# Altium PCB PCB_TUD-EHC-SolarModule_1.pcbdoc
Units mm, origin at the board's own origin, x right, y up, seen from the top; angles counter-clockwise.
Board outline 74.31 x 35.93 mm, 2 copper layers (Top Layer, Bottom Layer); 27 components, 21 nets, 81 pads, 19 vias.
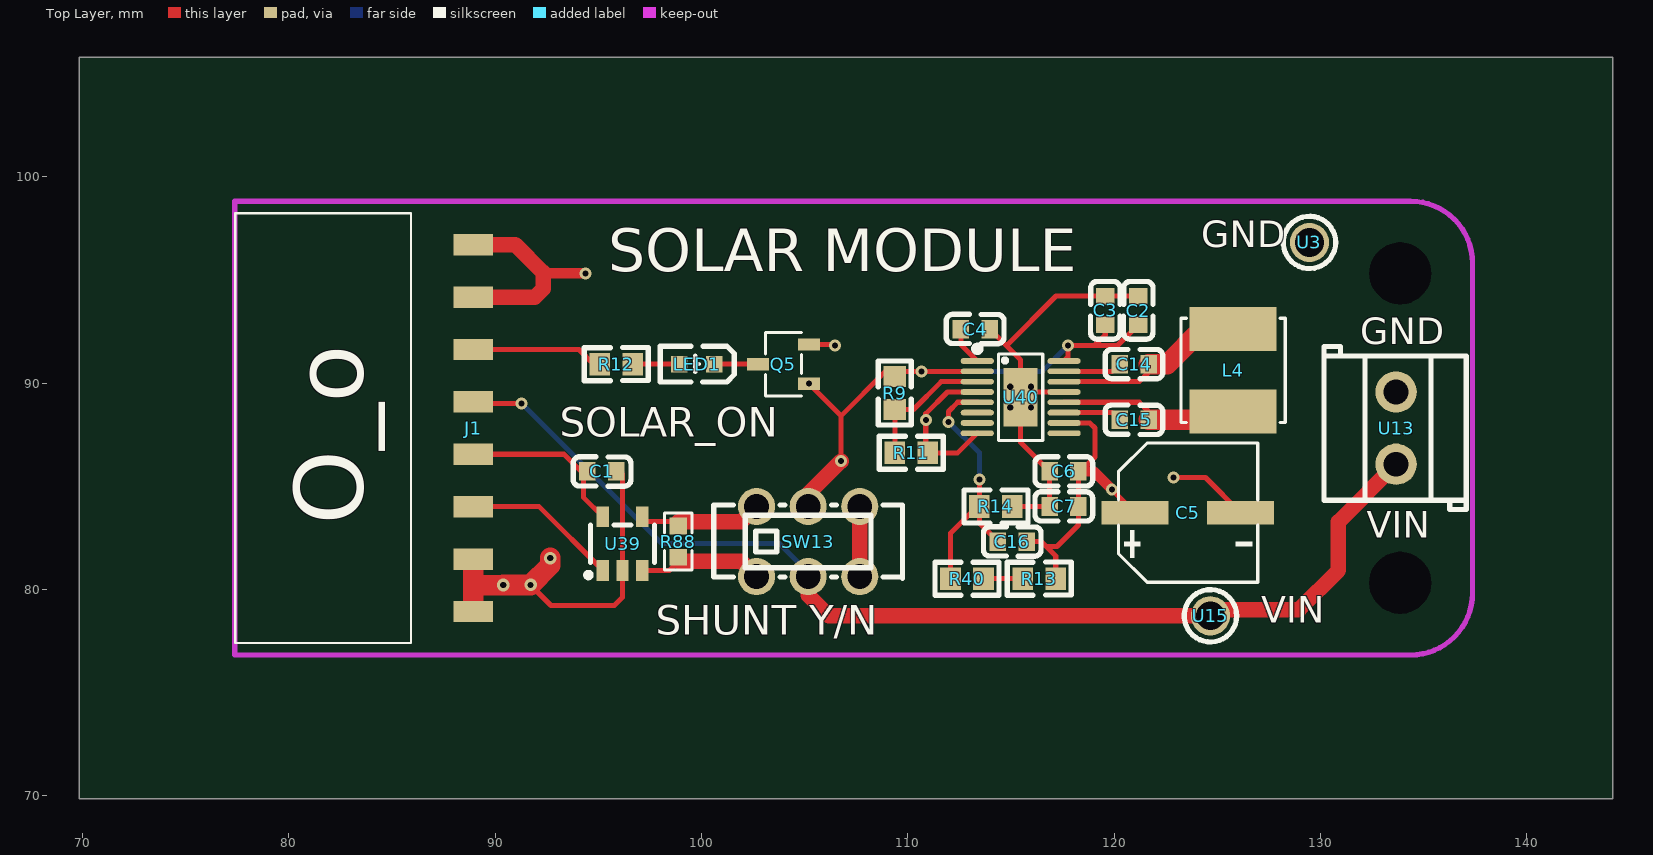
[diagram p0: Top Layer view]
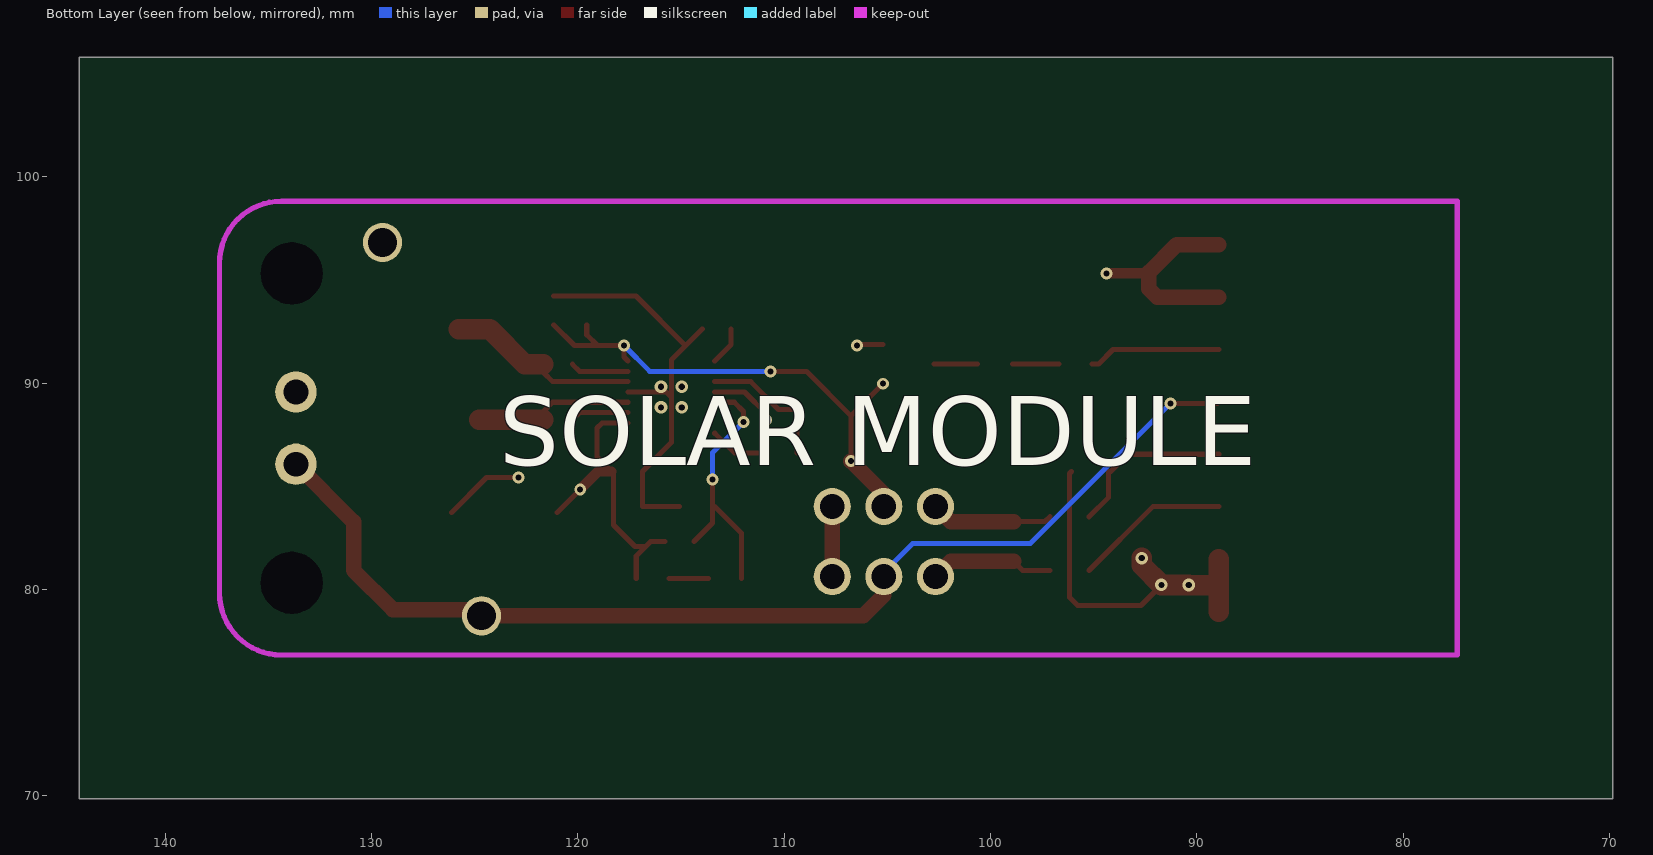
[diagram p1: Bottom Layer view, seen from below]

## Layer stack, top to bottom
Top Layer: signal copper (thickness not stored)
Dielectric: dielectric 0.32, FR-4, Dk 4.8
Bottom Layer: signal copper (thickness not stored)

## Board outline
144.162,69.85 69.85,69.85 69.85,105.78 144.162,105.78
cut-out: 135.373,95.315 ccw(c133.873,95.315) 132.373,95.315 ccw(c133.873,95.315)
cut-out: 135.373,80.315 ccw(c133.873,80.315) 132.373,80.315 ccw(c133.873,80.315)

## Components (designator, comment, footprint, x,y, rotation, side; value= is the part's Value field where it differs from the comment)
C1 "100nF" C0603 95.173,85.715 r180 top
C2 "4.7uF" C0603 121.173,93.515 r270 top
C3 "4.7uF" C0603 119.573,93.515 r270 top
C4 "4.7uF" C0603 113.273,92.615 r0 top
C5 "220uF" CAP-SMD_BD6.3-L6.6-W6.6-LS7.2-R-RD 123.573,83.715 r180 top
C6 "4.7uF" C0603 117.573,85.715 r0 top
C7 "4.7uF" C0603 117.573,84.015 r0 top
C14 "CL10B223KB8NNNC" C0603 120.973,90.915 r0 top
C15 "CL10B223KB8NNNC" C0603 120.973,88.215 r0 top
C16 "CL10C200JB8NNNC" C0603 115.073,82.315 r0 top
J1 "SMH-108-02-G-S-TR" SMH-108-02-XX-S-TR 88.93,87.815 r270 top
L4 "SWPA5040S4R7NT" IND-SMD_L5.0-W5.0 125.773,90.615 r90 top
LED1 "KT-0603R" LED0603-R-RD 99.773,90.915 r180 top
Q5 "AO3400A" SOT-23-3_L2.9-W1.6-P1.90-LS2.8-BR 103.973,90.915 r0 top
R9 "1MΩ" R0603#1 109.373,89.515 r90 top
R11 "5.1MΩ" R0603#1 110.173,86.615 r0 top
R12 "1kΩ" R0603#1 95.873,90.915 r0 top
R13 "3MΩ" R0603#1 116.373,80.515 r0 top
R14 "1MΩ" R0603#1 114.273,84.015 r180 top
R40 "200kΩ" R0603#1 112.873,80.515 r180 top
R88 "0603WAF220JT5E" R0603#2 98.873,82.315 r270 top
SW13 "K3-2235D-F1" SW-TH_K3-2235D-F1 105.173,82.315 r0 top
U3 "5001" TEST-TH_BD2.54-P1.39 129.473,96.815 r0 top
U13 "KF350-3.5-2P" CONN-TH_P3.50_KF350-3.5-2P 133.673,87.815 r90 top
U15 "5001" TEST-TH_BD2.54-P1.39 124.673,78.715 r0 top
U39 "INA180A3IDBVR" SOT-23-5_L3.0-W1.7-P0.95-LS2.8-BR 96.173,82.215 r270 top
U40 "LTC3129EMSE-1#PBF" MSOP-16_L4.0-W3.0-P0.50-LS4.9-BL-EP 115.473,89.315 r270 top

## Footprints (in the part's own frame and the unit in brackets; to place one, negate y for a bottom-side part, rotate by r counter-clockwise, add the part's x,y. Pads: shape width x height; smd on the part's side, far side on the other; paste and mask are expansions set on the pad)
C0603 [mm]
  rect 0.8x0.9 smd paste+0 mask+0.051: 1(-0.7,0) 2(0.7,0)
  silkscreen extent -1.41,-0.71 1.39,0.72
CAP-SMD_BD6.3-L6.6-W6.6-LS7.2-R-RD [mm]
  rect 3.26x1.15 smd paste+0 mask+0.051: 1(2.555,0) 2(-2.555,0)
  silkscreen extent -3.39,-3.38 3.36,3.38
CONN-TH_P3.50_KF350-3.5-2P [mm]
  round 2 hole 1.2 paste+0 mask+0.051: 1(-1.75,0) 2(1.75,0)
  silkscreen extent -3.95,-3.4 3.95,3.5
IND-SMD_L5.0-W5.0 [mm]
  rect 2.124x4.22 smd paste+0 mask+0.051: 1(2,0) 2(-2,0)
  silkscreen extent -2.53,-2.53 2.53,2.53
LED0603-R-RD [mm]
  rect 0.8x0.8 smd paste+0 mask+0.051: 1(0.851,0) 2(-0.851,0)
  silkscreen extent -1.82,-0.86 1.77,0.86
MSOP-16_L4.0-W3.0-P0.50-LS4.9-BL-EP [mm]
  oval 0.28x1.608 smd paste+0 mask+0.051: 1(-1.75,-2.104) 2(-1.25,-2.104) 3(-0.75,-2.104) 4(-0.25,-2.104) 5(0.25,-2.104) 6(0.75,-2.104) 7(1.25,-2.104) 8(1.75,-2.104) 9(1.75,2.104) 10(1.25,2.104) 11(0.75,2.104) 12(0.25,2.104) 13(-0.25,2.104) 14(-0.75,2.104) 15(-1.25,2.104) 16(-1.75,2.104)
  rect 2.845x1.651 smd paste+0 mask+0.051: 17(0,0)
  silkscreen extent -2.49,-2.25 2.1,1.07
R0603#1 [mm]
  rect 1x1.1 smd paste+0 mask+0.051: 1(-0.8,0) 2(0.8,0)
  silkscreen extent -1.55,-0.8 1.55,0.81
R0603#2 [mm]
  rect 0.806x0.864 smd paste-100 mask+0.051: 1(-0.753,0) 2(0.753,0)
  silkscreen extent -1.39,-0.66 1.39,0.66
SMH-108-02-XX-S-TR [mm]
  rect 1.04x1.91 smd paste+0 mask+0.051: 1(-8.89,0) 2(-6.35,0) 3(-3.81,0) 4(-1.27,0) 5(1.27,0) 6(3.81,0) 7(6.35,0) 8(8.89,0)
  silkscreen extent -10.42,-11.53 10.42,-3.02
SOT-23-3_L2.9-W1.6-P1.90-LS2.8-BR [mm]
  rect 1.07x0.6 smd paste+0 mask+0.051: 1(1.235,-0.95) 2(1.235,0.95) 3(-1.235,0)
  silkscreen extent -0.88,-1.54 0.88,1.54
SOT-23-5_L3.0-W1.7-P0.95-LS2.8-BR [mm]
  rect 1x0.6 smd paste+0 mask+0.051: 1(1.3,-0.95) 2(1.3,0) 3(1.3,0.95) 4(-1.3,0.95) 5(-1.3,-0.95)
  silkscreen extent -0.9,-1.78 1.65,1.55
SW-TH_K3-2235D-F1 [mm]
  round 1.8 hole 1.2 paste+0 mask+0.051: 1(-2.5,1.7) 2(0,1.7) 3(2.5,1.7) 4(-2.5,-1.7) 5(0,-1.7) 6(2.5,-1.7)
  silkscreen extent -4.57,-1.78 4.57,1.78
TEST-TH_BD2.54-P1.39 [mm]
  round 1.9 hole 1.39 paste+0 mask+0.051: 1(0,0)
  silkscreen extent -1.27,-1.27 1.27,1.27

## Via types
v1: diameter 0.58, hole 0.29, Top Layer to Bottom Layer, 12 vias
v2: diameter 0.61, hole 0.305, Top Layer to Bottom Layer, 7 vias

## Nets (pads, with @x,y where several pads share a name; then routed paths per layer and width w, separated by ;. In a path a pad name is that pad's centre, name@x,y a point inside that pad or via, vN(x,y) a via of type N, cw(c..) or ccw(c..) an arc to the next point about the centre after c; other vN are vias at no path point)
$1N12: LED1.1 R12.2 | length 2.2
  Top Layer w0.248: R12.2 LED1.1
$1N552: LED1.2 Q5.3 | length 2.1
  Top Layer w0.248: LED1.2 Q5.3
$1N7152: R88.1 SW13.1 U39.4 | length 6
  Top Layer w0.248: U39.4 97.357,83.281 R88.1@98.873,83.281
  Top Layer w0.75: R88.1@98.873,83.281 101.939,83.281 SW13.1
$1N7153: R88.2 SW13.4 U39.3 | length 6
  Top Layer w0.248: U39.3 98.439,80.915 R88.2@98.873,81.349
  Top Layer w0.75: R88.2@98.873,81.349 101.939,81.349 SW13.4
$1N8568: SW13.3 SW13.6 | length 3.4
  Top Layer w0.75: SW13.6 SW13.3
$1N19808: R9.1 R11.1 U40.3 | length 6.7
  Top Layer w0.248: R11.1 R9.1 110.273,88.715 111.623,90.065 U40.3
$1N21422: C4.1 U40.1 | length 1.9
  Top Layer w0.248: C4.1 112.573,91.861 U40.1
$1N21903: C15.2 L4.2 U40.12 | length 7.8
  Top Layer w0.248: U40.12 121.223,89.065 121.673,88.615 C15.2
  Top Layer w1: C15.2 L4.2@124.773,88.215
$1N21940: C14.2 L4.1 U40.14 | length 9.5
  Top Layer w0.248: U40.14 121.223,90.065 121.673,90.515 C14.2
  Top Layer w1: C14.2 122.573,90.915 124.273,92.615 L4.1
$1N21977: C14.1 U40.15 | length 2.8
  Top Layer w0.248: U40.15 119.923,90.565 C14.1
$1N22012: C15.1 U40.11 | length 2.8
  Top Layer w0.248: U40.11 119.923,88.565 C15.1
$1N22987: R13.1 R40.1 | length 1.9
  Top Layer w0.248: R40.1 R13.1
CONN_IN: J1.4 SW13.5 U13.1 U15.1 | length 54.1
  Top Layer w0.248: J1.4 89,89.015 v1(91.273,89.015)
  Top Layer w0.75: SW13.5 105.173,79.715 106.173,78.715 124.373,78.715 124.673,79.015 128.973,79.015 130.873,80.915 130.873,83.265 U13.1
  Bottom Layer w0.248: v1(91.273,89.015) 98.073,82.215 103.773,82.215 105.173,80.815 SW13.5
CURR_SENSE: J1.6 U39.1 | length 7.6
  Top Layer w0.248: J1.6 92.133,84.005 U39.1
DEBUG_5V: J1.3 R12.1 | length 6.4
  Top Layer w0.248: J1.3 94.063,91.625 94.773,90.915 R12.1
GND: C1.1 C2.1 C3.1 C4.2 C5.2 C6.1 C7.1 J1.7 J1.8 Q5.2 R11.2 R14.1 U3.1 U13.2 U39.2 U40.4 U40.8 U40.13 U40.17 | length 52.3
  Top Layer w0.248: v2(91.717,80.211) 92.713,79.215 95.773,79.215 96.173,79.615 U39.2 96.173,85.615 C1.1@96.073,85.715 ; Q5.2 106.423,91.865 v1(106.473,91.815) ; U40.8 112.419,86.615 R11.2 110.873,86.715 v1(110.873,88.215) 110.873,88.515 111.923,89.565 U40.4 ; C4.2 114.782,91.805 ; R14.1 C7.1 ; C7.1 C6.1 115.473,87.115 U40.17 ; U40.13 115.723,89.565 U40.17 ; C2.1 C3.1 117.192,94.215 114.782,91.805 ; v1(122.873,85.415) 124.428,85.415 C5.2 ; 114.782,91.805 115.473,91.115 U40.17
  Top Layer w1: J1.8 J1.7 ; 88.93,80.204 v2(90.396,80.208) v2(91.717,80.211) 92.673,81.167 v2(92.673,81.515)
PWR_IN: C2.2 C3.2 Q5.1 R9.2 SW13.2 U40.2 U40.16 | length 28.2
  Top Layer w0.248: v1(105.208,89.965) 106.773,88.4 ; v1(106.773,86.215) 106.773,88.4 ; U40.2 v1(110.672,90.565) 108.923,90.565 106.773,88.415 106.773,88.4 ; U40.16 117.773,91.261 v1(117.773,91.815) 119.046,91.815 ; C3.2 119.573,92.342 119.046,91.815 ; C2.2 120.173,91.815 119.046,91.815
  Top Layer w0.75: SW13.2 105.173,84.615 v1(106.773,86.215)
  Bottom Layer w0.248: v1(110.672,90.565) 116.523,90.565 v1(117.773,91.815)
V_FB: C16.1 R14.2 R40.2 U40.5 | length 13
  Top Layer w0.248: v1(111.973,88.115) 111.973,88.615 112.423,89.065 U40.5 ; R40.2 112.073,82.715 113.373,84.015 R14.2 ; v1(113.473,85.315) R14.2 ; C16.1 113.473,83.215 R14.2
  Bottom Layer w0.248: v1(111.973,88.115) 113.473,86.615 v1(113.473,85.315)
V_OUT: C5.1 C6.2 C7.2 C16.2 J1.1 J1.2 R13.2 U40.10 | length 60.2
  Top Layer w0.248: C16.2 116.473,82.315 116.717,82.071 ; R13.2 117.173,81.615 116.717,82.071 ; U40.10 118.823,88.065 119.073,87.815 119.073,86.415 C6.2@118.373,85.715 ; C6.2 C7.2 118.273,83.115 117.229,82.071 116.717,82.071 ; v1(119.889,84.844) C5.1
  Top Layer w0.5: 92.374,95.315 v1(94.373,95.315) ; C6.2@118.373,85.715 119.018,85.715 v1(119.889,84.844)
  Top Layer w0.75: J1.2@88.93,94.164 91.922,94.164 92.323,94.565 92.323,95.366 90.982,96.704 J1.1@88.93,96.704
  V+ w0.248: v1(94.373,95.315) 118.373,95.315 119.889,93.799 v1(119.889,84.844)
V_SENSING: C1.2 J1.5 U39.5 | length 8.3
  Top Layer w0.248: J1.5 93.343,86.545 94.173,85.715 94.273,85.715 94.273,84.465 U39.5
"": U40.6 U40.7 U40.9
  other v2: 114.973,88.815 115.973,88.815 114.973,89.815 115.973,89.815

## Polygon pours and split planes (outlines as drawn)
GND on GND (split plane): 137.222,79.815 cw(c135.792,78.397) 134.376,76.965 ccw(c134.374,76.95) 134.373,76.966 80.474,76.966 77.524,76.966 77.524,98.664 134.371,98.664 134.373,98.664 cw(c135.798,97.24) 137.222,95.815 137.222,79.819 ccw(c137.236,79.817)
GND on GND (split plane): 133.17,88.306 133.17,89.565 134.175,89.565 134.175,88.306
GND on GND (split plane): 134.175,90.824 134.175,89.565 133.17,89.565 133.17,90.824
GND on GND (split plane): 132.414,90.067 133.673,90.067 133.673,89.062 132.414,89.062
GND on GND (split plane): 133.673,90.067 134.932,90.067 134.932,89.062 133.673,89.062
GND on GND (split plane): 128.264,97.292 129.473,97.292 129.473,96.337 128.264,96.337
GND on GND (split plane): 129.473,97.292 130.682,97.292 130.682,96.337 129.473,96.337
GND on GND (split plane): 128.995,96.815 128.995,98.024 129.95,98.024 129.95,96.815
GND on GND (split plane): 129.95,96.815 129.95,95.606 128.995,95.606 128.995,96.815

## Keep-outs
Board Outline Layer:
  lines w0.254 net "": 77.373,76.816 80.474,76.815 134.373,76.815 ; 77.373,76.815 77.373,98.815 134.371,98.815 ; 134.373,98.815 cw(c134.373,95.815) 137.373,95.815 137.373,79.815 ; 134.373,76.815 ccw(c134.373,79.815) 137.373,79.815 ; 134.373,76.815 ccw(c134.373,79.815) 137.373,79.815

## Silkscreen, mask and mechanical layers (free items; w line width, h text height)
Top Silkscreen Layer:
  text "GND" at 124.238,96.588 h1.29
  text "SOLAR MODULE" at 95.475,95.425 h2.08
  text "GND" at 131.938,91.888 h1.29
  text "SOLAR_ON" at 93.135,87.406 h1.44
  text "O_o" at 83.584,83.125 h3.35 r90
  text "VIN" at 132.238,82.488 h1.29
  text "VIN" at 127.138,78.388 h1.29
  text "SHUNT Y/N" at 97.772,77.806 h1.44
Bottom Silkscreen Layer:
  text "SOLAR MODULE" at 123.805,86.004 h3.35
Mechanical Layer:
  circle w0.025 net "": c133.873,95.315 r1.5
  circle w0.025 net "": c133.873,80.315 r1.5